# Altium PCB GPS_1.2.PcbDoc (part 1 of 2)
Units mil, origin at the board's own origin, x right, y up, seen from the top; angles counter-clockwise.
Board outline 1890 x 2770 mil, 4 copper layers (Top Layer, GND, VDD, Bottom Layer); 61 components, 50 nets, 274 pads, 157 vias.
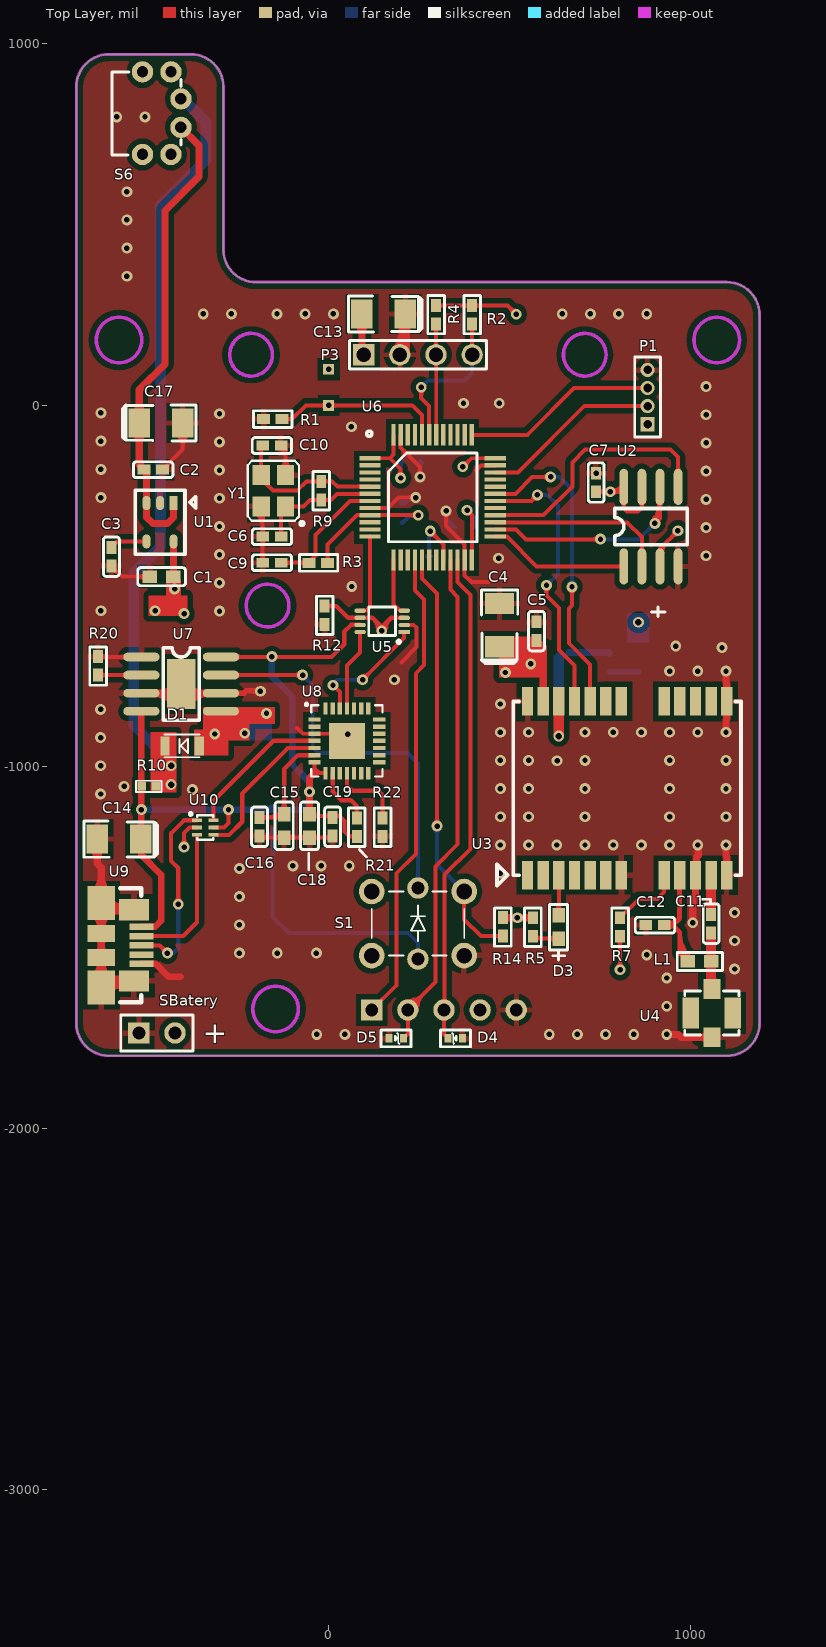
[diagram p0: Top Layer view]
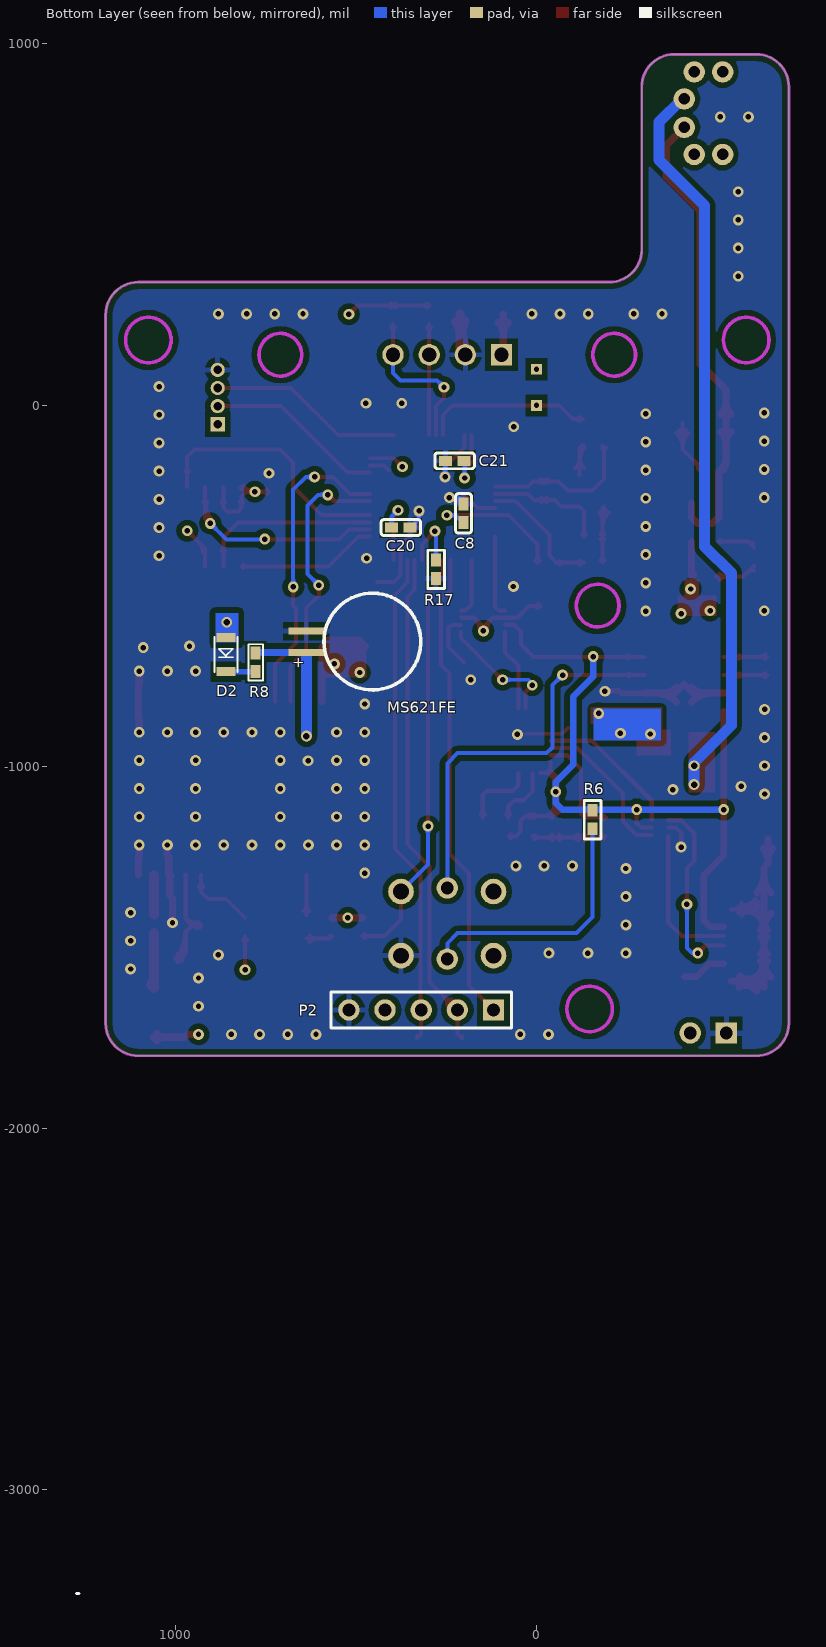
[diagram p1: Bottom Layer view, seen from below]
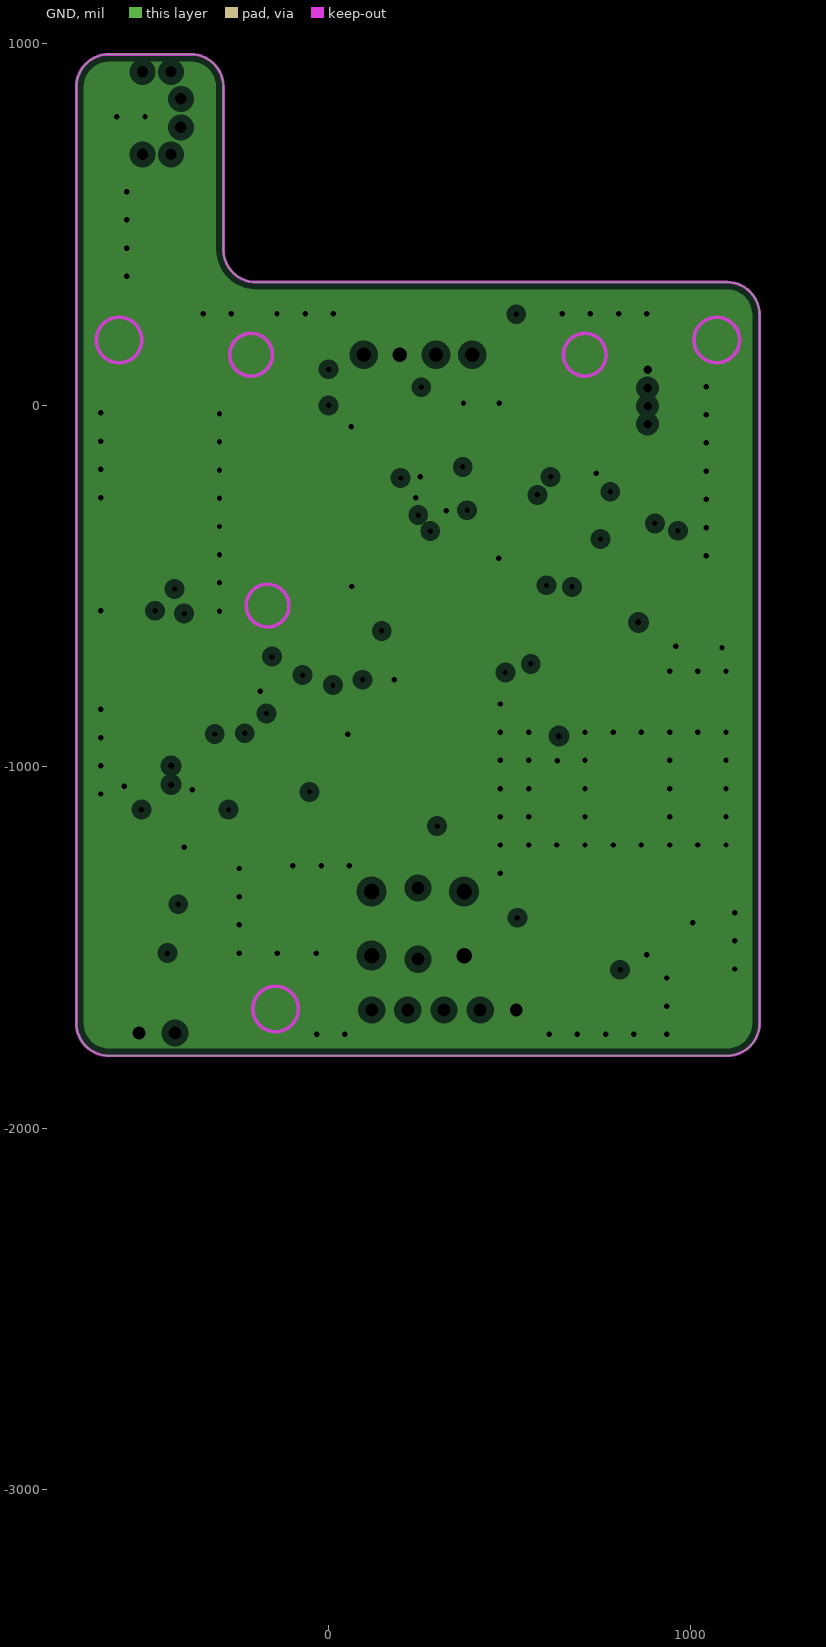
[diagram p2: GND, clearances drawn from the general rule]
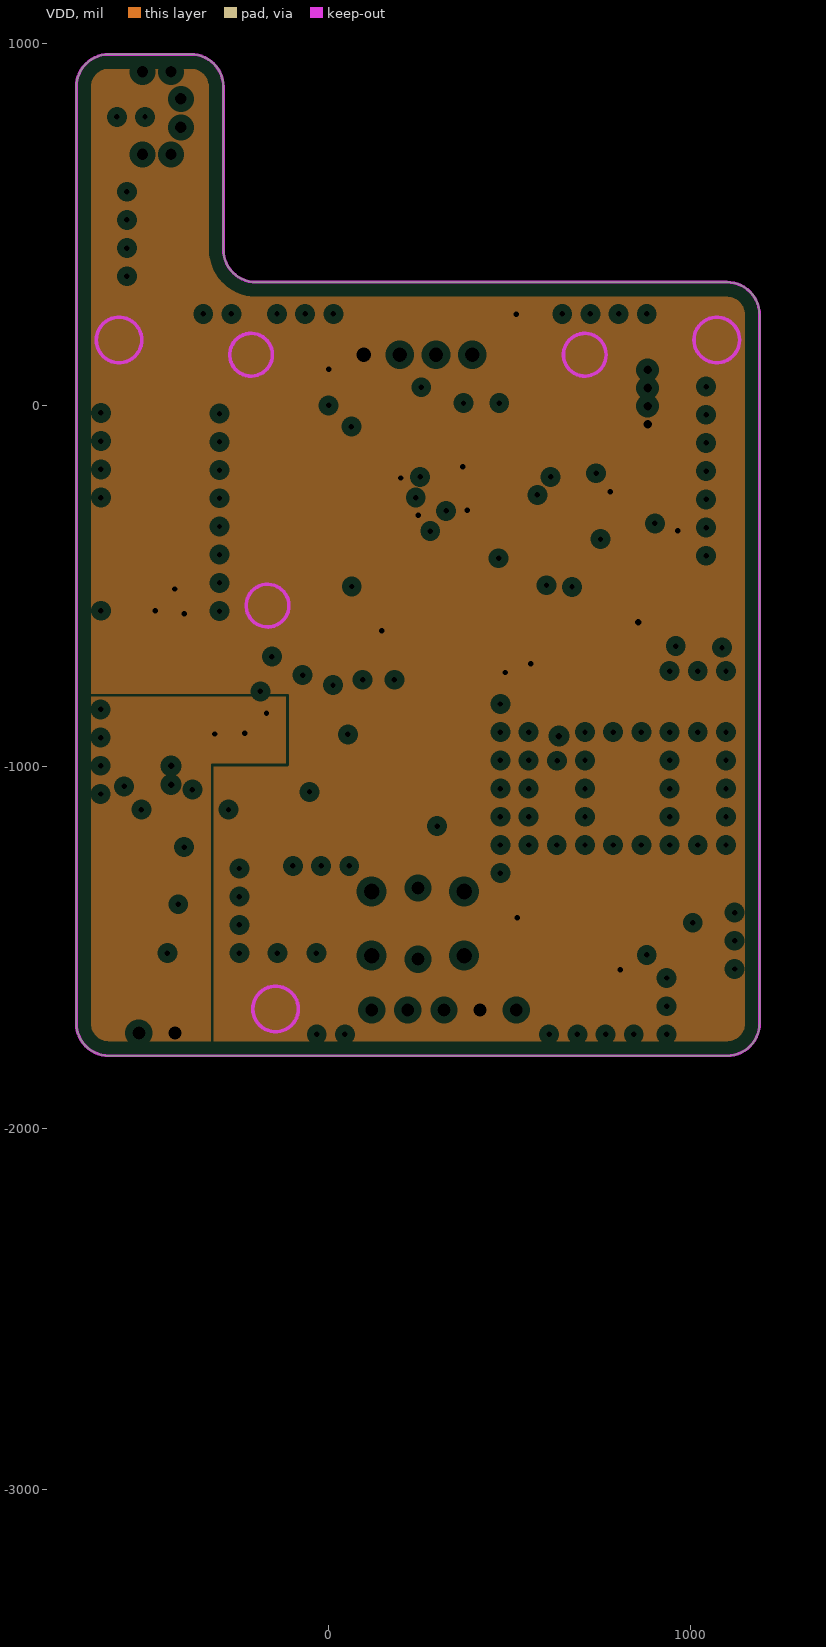
[diagram p3: VDD, clearances drawn from the general rule]

## Layer stack, top to bottom
Top Layer: signal copper 1.4
Dielectric: core 12.6, FR-4, Dk 4.8
GND: plane copper 1.4, net GND
Dielectric: prepreg 12.6, FR-4, Dk 4.8
VDD: plane copper 1.4, net VDD
Dielectric: core 12.6, FR-4, Dk 4.8
Bottom Layer: signal copper 1.4

## Board outline
-698,-1709 -698,881 cw(c-608,881) -608,971 -381,971 cw(c-381,881) -291,881 -291,430.68 ccw(c-201,430.68) -201,340.68 1101.76,340.68 cw(c1101.76,250.68) 1191.76,250.68 1191.76,-1709 1192,-1709 cw(c1102,-1709) 1102,-1799 -608,-1799 cw(c-608,-1709)

## Design rules (kind name [scope] priority, off if disabled: settings)
Clearance Clearance_1 [OnLayer('Keep-Out Layer')] p1 off: gap=20
Clearance Clearance_RF [InNetClass('RF')] p2 off: gap=20
Clearance [All] p3: gap=15
DiffPairsRouting [All] p1: maxlimit=10 minlimit=10 mostfreqgap=10 maxuncoupledlength=500
HoleSize [All] p1 off: absolutevalues=TRUE maxlimit=100 minlimit=1 maxpercent=80.000 minpercent=20.000
HoleToHoleClearance [All] p1 off: gap=10 allowstackedmicrovias=TRUE
LayerPairs [All] p1 off: enforce=TRUE
MinimumSolderMaskSliver [All] p1 off: minsoldermaskwidth=10
NetAntennae [All] p1 off: netantennaetolerance=0
PlaneClearance [All] p1: clearance=20
PlaneConnect [All] p1: planeconnectstyle=Relief reliefexpansion=20 reliefentries=4 reliefconductorwidth=15 reliefairgap=10
PolygonConnect PolygonConnect_1 [(InPadClass('All Pads'))] p1: connectstyle=Relief reliefconductorwidth=15 reliefentries=4 polygonreliefangle="90 Angle"
PolygonConnect [All] p2: connectstyle=Direct reliefconductorwidth=15 reliefentries=4 polygonreliefangle="90 Angle"
RoutingVias [All] p1: holewidth=28 width=50 viastyle="Through Hole" minholewidth=0 minwidth=0 maxholewidth=28 maxwidth=50
SilkToSilkClearance [All] p1 off: silktosilkclearance=10
SilkscreenOverComponentPads [All] p1 off: minsilkscreentomaskgap=10
SolderMaskExpansion [All] p1: expansion=4
Width [All] p1: maxlimit=50 minlimit=11 preferedwidth=11
18 further rules are at their usual default settings.

## Classes and differential pairs
differential pair D: +D_P -D_N

## Components (designator, comment, footprint, x,y, rotation, side; value= is the part's Value field where it differs from the comment)
C1 "10uF/10V" C0603 -462,-474 r0 top
C2 "0.1uF/10V" C0402 -511,-178 r180 top
C3 "0.01uF/10V" C0402 -601,-393 r90 top
C4 "10uF/10V" 3528 473,-668 r90 top
C5 "0.1uF/10V" C0402 575,-650 r270 top
C6 "18pF/10V" C0402 -182.5,-363.32 r180 top
C7 "0.01uF/10V" C0402 740,-239 r270 top
C8 "0.01uF/10V" C0402 202,-324.32 r270 bottom
C9 "0.01uF/10V" C0402 -182.5,-435.32 r180 top
C10 "18pF/10V" C0402 -131.31,-111.32 r0 top
C11 "470pF" C0402 1058,-1459.32 r270 top
C12 "33nF" C0402 877,-1438 r180 top
C13 "10uF/10V" C1206 152,253 r180 top
C14 "10uF/10V" 3528 -520,-1200 r180 top
C15 "4.7uF/10V" C0603 -123,-1163 r90 top
C16 "0.1uF/10V" C0402 -191,-1140 r90 top
C17 "10uF/10V" 3528 -524,-49 r0 top
C18 "10uF/10V" C0603 -53,-1163 r270 top
C19 "0.1uF/10V" C0402 11,-1140 r90 top
C20 "0.01uF/10V" C0402 401,-338 r0 bottom
C21 "0.01uF/10V" C0402 201,-153.32 r180 bottom
D1 "NSR0320MW2T1G" sod323 -358,-942 r180 top
D2 "RB751V40T1" SOD323 859,-642 r270 bottom
D3 "LED0" LED0603 636,-1475.32 r90 top
D4 "PESD0402-140" 0402-TVS 318,-1749 r180 top
D5 "PESD0402-140" 0402-TVS 219,-1753 r0 top
L1 "6.8nH" R0603 1026,-1538 r180 top
MS621FE "SBatery" MS621FE 637,-654 r0 bottom
P1 "MHDR1X4" SIP4_1.27 882,-52 r0 top
P2 "Header 5" HDR1X5 119,-1672.31 r0 bottom
P3 "MHDR1X4" OLED 246.88,140 r0 top locked
R1 "10K/5%" R0402 -128.81,-38 r0 top
R2 "5.1K/5%" R0402 397,225 r270 top
R3 "10K/5%" R0402 -54,-436 r180 top
R4 "5.1K/5%" R0402 297,225 r270 top
R5 "510R/5%" R0402 565,-1417.32 r90 top
R6 "1K/5%" R0402 -155,-1120 r90 bottom
R7 "10K/5%" R0402 806,-1417.32 r90 top
R8 "1K" 1005[0402] 777,-711 r90 bottom
R9 "1M/5%" R0402 -20.5,-210.32 r90 top
R10 "0" 0402R -478,-1054 r180 top
R12 "10K/5%" R0402 -11,-555 r90 top
R14 "10K/5%" R0402 482,-1417 r90 top
R17 "10K/5%" R0402 277.89,-427.81 r90 bottom
R20 "2K/5%" R0402 -638,-695 r90 top
R21 "1K/5%" R0402 78,-1141 r90 top
R22 "10K/5%" R0402 149,-1141 r90 top
S1 "KEY_TONE_LED" KEY_TONE_LED 246.88,-1433.41 r180 top locked (schematic designator U1)
S6 "SW-PB" KEY1 -408.63,768.88 r90 top locked
SBatery "SBatery" HDR1X2 -525,-1736 r0 top
U1 "TPS73633DBVR" SOP5-TPS73633DBVR -429,-270 r270 top
U2 "FM25V01" SO-8 816.5,-445.32 r90 top
U3 "NEO-M8N" NEO-M8N 550,-1299.32 r0 top locked
U4 "antenna" "Active antenna" 1060,-1681 r90 top locked
U5 "TXS0102" R-PDSO-G8 209,-627 r180 top
U6 "STM32F10xC8T6" LQFP-48 114.5,-146.32 r0 top
U7 "TP4056" SO-8-1 -408,-771 r0 top
U8 "CP2102" QFN-28 -39,-869 r0 top
U9 "USB" MOLEX-47346-0001 -518,-1442 r270 top
U10 "NUF2042XV6T1" UDFN -364,-1148 r270 top
Y1 "16MHz" OSCILLATOR-3.2X2.5 -153,-236 r180 top

## Footprints (in the part's own frame and the unit in brackets; to place one, negate y for a bottom-side part, rotate by r counter-clockwise, add the part's x,y. Pads: shape width x height; smd on the part's side, far side on the other; paste and mask are expansions set on the pad)
0402-TVS [mil]
  rect 20x24 smd: 1(-52,2) 2(-12.31,2)
  silkscreen extent -74,-21 9,25
0402R [mm]
  rect 0.6x0.6 smd: 1(0,0) 2(1,0)
  silkscreen extent -0.4,-0.4 1.4,0.4
1005[0402] [mm] "Chip Resistor; Body 1.1 x 0.5 mm (LxW typ)"
  rect 0.9x0.7 smd: 1(-0.65,0) 2(0.65,0)
  silkscreen extent -1.27,-0.51 1.27,0.51
3528 [mil]
  rect 59.05x80 smd: 1(0,0) 2(120,0)
  silkscreen extent -46,-50 157,50
"Active antenna" [mm]
  rect 1.4x1.2 smd: 0(-1.7,0) 1(1.7,0)
  rect 2.2x1.15 smd: 0(0,1.475) 0(0,-1.475)
  silkscreen extent -1.55,-1.91 1.55,1.91
C0402 [mm]
  rect 0.9x0.7 smd: 1(0,0) 2(-1.3,0)
  silkscreen extent -2.04,-0.56 0.74,0.56
C0603 [mil]
  rect 40x35 smd: 1(-32.5,0) 2(32.5,0)
  silkscreen extent -66,-25 66,25
C1206 [mil]
  rect 59.05x80 smd: 1(-60,0) 2(60,0)
  silkscreen extent -106,-50 97,50
HDR1X2 [mm] "Connector; Header; 2 Position"
  rect 1.5x1.5 hole 0.9: 1(0,0)
  round 1.5 hole 0.9: 2(2.54,0)
  silkscreen extent -1.27,-1.27 3.81,1.27
HDR1X5 [mm] "Connector; Header; 5 Position"
  rect 1.5x1.5 hole 0.9: 1(0,0)
  round 1.5 hole 0.9: 2(2.54,0) 3(5.08,0) 4(7.62,0) 5(10.16,0)
  silkscreen extent -1.27,-1.27 11.43,1.27
KEY1 [mm]
  round 1.5 hole 0.8: 0(-1.9,0.7) 0(-1.9,2.7) 0(3.9,0.7) 0(3.9,2.7) 1(0,0) 2(2,0)
  silkscreen extent -1.93,0 3.89,4.85
KEY_TONE_LED [mm]
  round 0.2 on Top Overlay: 0(0,0)
  round 1.8 hole 1.1: 1(-3.25,2.25) 2(3.25,2.25) 3(-3.25,-2.25) 4(3.25,-2.25)
  round 1.5 hole 0.9: 5(0,-2.5) 6(0,2.5)
  silkscreen extent -3.25,-2.25 3.25,2.25
LED0603 [mil]
  rect 40x35 smd: 1(0,0) 2(65,0)
  silkscreen extent -59,-25 94,25
LQFP-48 [mm]
  rect 1.5x0.3 smd: 1(0,0) 2(0,-0.5) 3(0,-1) 4(0,-1.5) 5(0,-2) 6(0,-2.5) 7(0,-3) 8(0,-3.5) 9(0,-4) 10(0,-4.5) 11(0,-5) 12(0,-5.5) 25(8.8,-5.5) 26(8.8,-5) 27(8.8,-4.5) 28(8.8,-4) 29(8.8,-3.5) 30(8.8,-3) 31(8.8,-2.5) 32(8.8,-2) 33(8.8,-1.5) 34(8.8,-1) 35(8.8,-0.5) 36(8.8,0)
  rect 0.3x1.5 smd: 13(1.65,-7.15) 14(2.15,-7.15) 15(2.65,-7.15) 16(3.15,-7.15) 17(3.65,-7.15) 18(4.15,-7.15) 19(4.65,-7.15) 20(5.15,-7.15) 21(5.65,-7.15) 22(6.15,-7.15) 23(6.65,-7.15) 24(7.15,-7.15) 37(7.15,1.65) 38(6.65,1.65) 39(6.15,1.65) 40(5.65,1.65) 41(5.15,1.65) 42(4.65,1.65) 43(4.15,1.65) 44(3.65,1.65) 45(3.15,1.65) 46(2.65,1.65) 47(2.15,1.65) 48(1.65,1.65)
  silkscreen extent -0.24,-5.86 7.51,1.91
MOLEX-47346-0001 [mil]
  rect 18x67 smd: 1(0,0) 2(26,0) 3(52,0) 4(77.59,0) 5(103.18,0)
  rect 94x75 smd: 6(-65,-111) 9(168.14,-111)
  rect 59x83 smd: 7(-47,-20) 8(150.43,-20)
  rect 47x75 smd: 10(84.97,-111) 11(19,-111)
  silkscreen extent -106,-59 209,0
MS621FE [mm]
  rect 2.5x0.5 smd: 1(0,-0.749) 2(0,0.749)
  silkscreen extent -8.04,-3.41 -1.25,3.39
NEO-M8N [mm]
  rect 0.8x2 smd: 1(0,0) 2(1.1,0) 3(2.2,0) 4(3.3,0) 5(4.4,0) 6(5.5,0) 7(6.6,0) 8(9.6,0) 9(10.7,0) 10(11.8,0) 11(12.9,0) 12(14,0) 13(14,12.2) 14(12.9,12.2) 15(11.8,12.2) 16(10.7,12.2) 17(9.6,12.2) 18(6.6,12.2) 19(5.5,12.2) 20(4.4,12.2) 21(3.3,12.2) 22(2.2,12.2) 23(1.1,12.2) 24(0,12.2)
  silkscreen extent -2.14,-0.76 15,12.2
OLED [mm]
  rect 1.5x1.5 hole 1: 1(-3.81,0)
  round 1.5 hole 1: 2(-1.27,0) 3(1.27,0) 4(3.81,0)
  Keep-Out Layer circle w0.254: c-11.725,0 r1.5
  Keep-Out Layer circle w0.254: c11.725,0 r1.5
  silkscreen extent -4.81,-1 4.81,1
OSCILLATOR-3.2X2.5 [mil]
  rect 48x56 smd: 1(-33.73,43.65) 2(-33.73,-43.65) 3(33.73,-43.65) 4(33.73,43.65)
  silkscreen extent -83,-83 71,95
QFN-28 [mil]
  rect 34x12 smd mask+5: 1(0,0) 2(0,-19.68) 3(0,-39.37) 4(0,-59.06) 5(0,-78.74) 6(0,-98.43) 7(0,-118.11) 15(179,-118.11) 16(179,-98.43) 17(179,-78.74) 18(179,-59.06) 19(179,-39.37) 20(179,-19.69) 21(179,0)
  rect 12x34 smd mask+5: 8(30.44,-148.56) 9(50.13,-148.56) 10(69.81,-148.56) 11(89.5,-148.56) 12(109.19,-148.56) 13(128.87,-148.56) 14(148.56,-148.56) 22(148.56,30.44) 23(128.87,30.44) 24(109.19,30.44) 25(89.5,30.44) 26(69.82,30.44) 27(50.13,30.44) 28(30.44,30.44)
  rect 100x100 smd mask+5: 29(89.5,-59.06)
  silkscreen extent -25,-158 188,44
R0402 [mm]
  rect 0.9x0.7 smd: 1(0,0) 2(-1.3,0)
  silkscreen extent -2.01,-0.58 0.69,0.58
R0603 [mil]
  rect 40x35 smd: 1(-32.5,0) 2(32.5,0)
  silkscreen extent -63,-25 62,25
R-PDSO-G8 [mm]
  rect 0.8x0.3 smd: 1(0,0)
  oval 0.8x0.3 smd: 2(0,-0.5) 3(0,-1) 4(0,-1.5) 5(3.1,-1.5) 6(3.1,-1) 7(3.1,-0.5) 8(3.1,0)
  silkscreen extent 0.29,-1.75 2.49,0.78
SIP4_1.27 [mm]
  rect 1x1 hole 0.6: 1(0,0)
  round 1 hole 0.6: 2(0,1.27) 3(0,2.54) 4(0,3.81)
  silkscreen extent -0.9,-0.9 0.9,4.71
SO-8 [mil]
  oval 100x24 smd: 1(0,0) 2(0,-50) 3(0,-100) 4(0,-150) 5(220,-150) 6(220,-100) 7(220,-50) 8(220,0)
  silkscreen extent 60,-175 160,25
SO-8-1 [mil]
  rect 78.74x137.8 smd: 0(0,0)
  oval 100x24 smd: 1(-110,75) 2(-110,25) 3(-110,-25) 4(-110,-75) 5(110,-75) 6(110,-25) 7(110,25) 8(110,75)
  silkscreen extent -50,-100 50,100
sod323 [mm]
  rect 0.65x1.35 smd: A(0,0) K(2.4,0)
  silkscreen extent -0.03,-0.8 2.44,0.8
SOD323 [mm]
  rect 0.65x1.35 smd: A(0,0) K(2.4,0)
  silkscreen extent -0.03,-0.8 2.44,0.8
SOP5-TPS73633DBVR [mm]
  rect 1x0.55 smd: 1(0,0)
  oval 1x0.55 smd: 2(0,-0.95) 3(0,-1.9) 4(2.7,-1.9) 5(2.7,0)
  silkscreen extent -0.9,-2.7 3.6,1.55
UDFN [mm]
  rect 0.25x0.7 smd: 1(0,0) 2(0.5,0) 3(1,0) 4(1,1.15) 5(0.5,1.15) 6(0,1.15)
  silkscreen extent -0.55,-0.55 1.35,1.15

## Part data
C1 C2 C3 C4 C5 C6 C7 C8 C9 C10 C11 C12 C15 C16 C18 C19 C20 C21: library part Cap, "Capacitor"
C13 C14 C17: library part "Cap Pol2", "Polarized Capacitor (Axial)"
D1 D2: library part Diode, "Default Diode"
D3: "Typical INFRARED GaAs LED"
D4 D5: library part "D Zener", "Zener Diode"
L1: library part Inductor, "Inductor"
P1 P3: "Header, 4-Pin"
P2: "Header, 5-Pin"
R1 R2 R3 R4 R5 R6 R7 R8 R9 R10 R12 R14 R17 R20: library part Res2, "Resistor"
R21 R22: library part Resistor, "Resistor SMD - IEC symbol version"
S6: "Switch"
U2: library part FM25CL64B
U6: library part STM32F100C8T6
U8: "Imported"
U9: library part MICRO_USB
Y1: library part XTAL3

## Free pads (board coordinates)
  rect 30x30 hole 15: 0(0,100) 1(0,0)

## Via types
v1: diameter 30, hole 15, Top Layer to Bottom Layer, 153 vias
v2: diameter 30, hole 18, Top Layer to Bottom Layer, 4 vias

## Nets (pads, with @x,y where several pads share a name; then routed paths per layer and width w, separated by ;. In a path a pad name is that pad's centre, name@x,y a point inside that pad or via, vN(x,y) a via of type N, cw(c..) or ccw(c..) an arc to the next point about the centre after c; other vN are vias at no path point)
BAT: D1.A SBatery.2 U7.5
  other v1: -315,-909 -232,-907 -172,-852
CHRG: S1.5 U7.7 | length 1284.6
  Top Layer w11: U7.7@-298,-746 v1(-72,-746) ; -244.31,-746 cw(c-244.31,-730.31) -255.4,-741.4 ccw(c-244.31,-730.31) -244.31,-746 ; -244.31,-746 ccw(c-244.31,-761.69) -255.4,-750.6 cw(c-244.31,-761.69) -244.31,-746 ; -94.94,-746 cw(c-94.94,-768.93) -78.72,-752.72 ccw(c-94.94,-768.93) -94.94,-746 ; -94.94,-746 ccw(c-94.94,-723.07) -78.72,-739.28 cw(c-94.94,-723.07) -94.94,-746
  Bottom Layer w11: v1(-72,-746) -44,-774 -44,-946 -28,-962 218,-962 246.88,-990.88 S1.5@246.88,-1334.98 ; -55.78,-762.22 cw(c-39.56,-746) -62.5,-746 ccw(c-39.56,-746) -55.78,-762.22 ; -55.78,-762.22 ccw(c-72,-778.43) -72,-755.5 cw(c-72,-778.43) -55.78,-762.22
D_N: U8.5 U10.4 | length 425.2
  Top Layer w12: U10.4@-318.72,-1188.61 -275.61,-1188.61 -239,-1152 -239,-1074 -112.74,-947.74 U8.5@-39,-947.74
D_P: U8.4 U10.6 | length 401.4
  Top Layer w12: U10.6@-318.72,-1146.76 -318.72,-1093.72 -153.06,-928.06 U8.4@-39,-928.06
FRAM_CLK: U2.6 U6.26 | length 1107.8
  Top Layer w11: U6.26@460.96,-343.16 518.16,-343.16 546.31,-371.32 750.69,-371.32 v1(752,-370) ; v1@900.9,-316.95 ccw(c897.4,-296.45) 915.42,-306.85 ; v1@901.18,-327.02 cw(c916.99,-318.65) 901.5,-309.7 ; v1(902.5,-326.32) 916.5,-312.31 ; U2.6@910.87,-266.56 cw(c892.49,-277.18) 913,-282.67 ; v1@910.9,-321.87 cw(c937.75,-307.67) 911.44,-292.48 ; v1@911.68,-323.86 cw(c929.06,-319.2) 913.48,-310.21 ; U2.6@916.5,-225.32 916.5,-312.31 ; 916.5,-312.32 cw(c905.27,-301.09) 903.54,-316.87 ccw(c905.27,-301.09) 916.5,-312.32 ; 916.5,-312.32 ccw(c927.73,-323.54) 911.95,-325.28 cw(c927.73,-323.54) 916.5,-312.32 ; 916.5,-279.01 cw(c932.2,-279.01) 921.1,-267.91 ccw(c932.2,-279.01) 916.5,-279.01 ; 916.5,-279.01 ccw(c900.81,-279.01) 911.91,-267.91 cw(c900.81,-279.01) 916.5,-279.01 ; 725.89,-371.32 ccw(c725.89,-343.89) 745.28,-363.28 cw(c725.89,-343.89) 725.89,-371.32 ; 732.24,-371.32 cw(c732.24,-389.76) 745.28,-376.72 ccw(c732.24,-389.76) 732.24,-371.32 ; v1@895.79,-319.6 ccw(c845.77,-269.58) 916.5,-269.58 cw(c845.77,-269.58) v1@895.79,-319.6 ; v1@903.56,-327.38 ccw(c872.33,-296.14) 916.5,-296.14 cw(c872.33,-296.14) v1@903.56,-327.38
  Bottom Layer w11: v1@752,-371.32 857.5,-371.32 v1(902.5,-326.32) ; 886.29,-342.53 cw(c902.5,-358.75) 902.5,-335.82 ccw(c902.5,-358.75) 886.29,-342.53 ; 886.29,-342.53 ccw(c870.07,-326.32) 893,-326.32 cw(c870.07,-326.32) 886.29,-342.53
FRAM_CS: U2.1 U6.25 | length 439
  Top Layer w11: U6.25@460.96,-362.85 492.85,-362.85 575.31,-445.32 U2.1@816.5,-445.32 ; 800.81,-445.32 cw(c800.81,-461.01) 811.91,-449.91 ccw(c800.81,-461.01) 800.81,-445.32 ; 800.81,-445.32 ccw(c800.81,-429.62) 811.91,-440.72 cw(c800.81,-429.62) 800.81,-445.32
FRAM_MISO: U2.2 U6.27 | length 552.6
  Top Layer w11: U6.27@460.96,-323.48 825.48,-323.48 866.5,-364.5 U2.2@866.5,-445.32 ; 866.5,-391.62 cw(c850.81,-391.62) 861.91,-402.72 ccw(c850.81,-391.62) 866.5,-391.62 ; 866.5,-391.62 ccw(c882.2,-391.62) 871.1,-402.72 cw(c882.2,-391.62) 866.5,-391.62
FRAM_MOSI: U2.5 U6.28 | length 759.5
  Top Layer w11: U6.28@460.96,-303.8 594.2,-303.8 674,-224 674,-157.82 709.5,-122.32 945.5,-122.32 966.5,-143.32 U2.5@966.5,-225.32 ; 966.5,-171.62 cw(c950.81,-171.62) 961.91,-182.72 ccw(c950.81,-171.62) 966.5,-171.62 ; 966.5,-171.62 ccw(c982.2,-171.62) 971.1,-182.72 cw(c982.2,-171.62) 966.5,-171.62
GND: C1.1 C2.2 C3.2 C4.2 C5.2 C6.1 C7.2 C8.2 C9.1 C10.1 C12.1 C13.1 C14.2 C15.1 C16.2 C17.2 C18.2 C19.2 C20.2 C21.2 D4.1 D5.1 MS621FE.1 P1.4 P2.5 P3.2 R1.2 R12.2 R17.2 R20.1 R22.2 S1.1 SBatery.1 U1.2 U2.4 U3.7 U3.10 U3.12 U3.13 U3.24 U4.0@1060,-1747.93 U5.2 U6.8 U6.23 U6.35 U6.47 U7.0 U7.1 U7.3 U7.6 U8.3 U8.29 U9.5 U9.6 U9.7 U9.8 U9.9 U9.10 U9.11 U10.2 Y1.2 Y1.4 | length 10048.3
  Top Layer w11: U9.6@-629,-1377 -611,-1395 U9.7@-538,-1395 ; C3.2@-601,-444.18 -571.18,-474 C1.1@-494.5,-474 ; C2.2@-459.82,-178 -404,-122.18 C17.2@-404,-49 ; C16.2@-191,-1191.18 -186.68,-1195.5 C15.1@-123,-1195.5 C18.2@-53,-1195.5 6.68,-1195.5 C19.2@11,-1191.18 ; v1@-190,-790 v1(-189,-791) ; Y1.4@-186.73,-279.65 -182.5,-283.89 C6.1@-182.5,-363.32 C9.1@-182.5,-435.32 ; C10.1@-131.31,-111.32 -119.27,-123.36 Y1.2@-119.27,-192.35 ; -123.2,-134.54 cw(c-110.21,-127.04) C10.1@-121.27,-116.91 ; -87,-892 -70.63,-908.37 U8.3@-39,-908.37 U8.29@30.81,-908.37 ; U6.8@114.5,-284.11 163.89,-284.11 193,-255 v1(241,-255) ; U6.47@199.15,-81.35 199.15,-117.15 253,-171 v1(253,-198) ; 201,-711 243,-669 243,-615 235.31,-607.32 U5.2@209,-607.32 ; v1(325,-292) 325,-334 376.31,-385.31 U6.23@376.31,-427.81 376.31,-470.31 395,-489 442,-489 ; 408,-180 422,-166 U6.35@460.96,-166 ; U9.6@-607.94,-1395 cw(c-607.94,-1452.94) -566.97,-1411.97 ccw(c-607.94,-1452.94) U9.6@-607.94,-1395 ; U9.6@-607.94,-1395 ccw(c-607.94,-1337.06) -566.97,-1378.03 cw(c-607.94,-1337.06) U9.6@-607.94,-1395 ; -591.31,-1387.34 cw(c-598.75,-1415.08) -572.19,-1404.14 ccw(c-598.75,-1415.08) -591.31,-1387.34 ; -591.31,-1387.34 ccw(c-585.67,-1366.29) -568.7,-1379.95 cw(c-585.67,-1366.29) -591.31,-1387.34 ; -588.43,-1381.49 cw(c-593.61,-1400.8) -573.79,-1398.16 ccw(c-593.61,-1400.8) -588.43,-1381.49 ; -588.43,-1381.49 ccw(c-581.72,-1356.44) -565.25,-1376.47 cw(c-581.72,-1356.44) -588.43,-1381.49 ; -586.74,-1398.88 cw(c-583.31,-1411.68) -571.46,-1405.75 ccw(c-583.31,-1411.68) -586.74,-1398.88 ; -586.74,-1398.88 ccw(c-592.34,-1377.99) -572.27,-1386.05 cw(c-592.34,-1377.99) -586.74,-1398.88 ; -581.38,-1395 cw(c-581.38,-1426.38) -559.19,-1404.19 ccw(c-581.38,-1426.38) -581.38,-1395 ; -581.38,-1395 ccw(c-581.38,-1363.62) -559.19,-1385.81 cw(c-581.38,-1363.62) -581.38,-1395 ; U9.7@-574.36,-1404 cw(c-565.91,-1372.48) -597.76,-1379.56 ccw(c-565.91,-1372.48) U9.7@-574.36,-1404 ; U9.7@-574.36,-1404 ccw(c-584.39,-1441.46) -608.84,-1411.35 cw(c-584.39,-1441.46) U9.7@-574.36,-1404 ; U9.7@-538,-1395 cw(c-538.01,-1304.53) -605.22,-1365.08 ccw(c-538.01,-1304.53) U9.7@-538,-1395 ; -525.97,-474 cw(c-525.97,-502.97) -505.49,-482.49 ccw(c-525.97,-502.97) -525.97,-474 ; -525.97,-474 ccw(c-525.97,-445.03) -505.49,-465.51 cw(c-525.97,-445.03) -525.97,-474 ; -404,-117.48 cw(c-345.99,-117.48) -387.01,-76.46 ccw(c-345.99,-117.48) -404,-117.48 ; -404,-117.48 ccw(c-462.01,-117.48) -420.99,-76.46 cw(c-462.01,-117.48) -404,-117.48 ; -404,-90.92 cw(c-372.55,-90.92) -394.79,-68.68 ccw(c-372.55,-90.92) -404,-90.92 ; -404,-90.92 ccw(c-435.45,-90.92) -413.21,-68.68 cw(c-435.45,-90.92) -404,-90.92 ; -182.5,-415.33 cw(c-202.48,-415.33) -188.35,-429.46 ccw(c-202.48,-415.33) -182.5,-415.33 ; -182.5,-415.33 ccw(c-162.51,-415.33) -176.64,-429.46 cw(c-162.51,-415.33) -182.5,-415.33 ; -182.5,-383.3 cw(c-162.51,-383.3) -176.64,-369.17 ccw(c-162.51,-383.3) -182.5,-383.3 ; -182.5,-383.3 ccw(c-202.48,-383.3) -188.35,-369.17 cw(c-202.48,-383.3) -182.5,-383.3 ; -182.5,-343.33 cw(c-202.48,-343.33) -188.35,-357.46 ccw(c-202.48,-343.33) -182.5,-343.33 ; -182.5,-343.33 ccw(c-162.51,-343.33) -176.64,-357.46 cw(c-162.51,-343.33) -182.5,-343.33 ; -151.97,-1195.5 cw(c-151.97,-1224.47) -131.49,-1203.99 ccw(c-151.97,-1224.47) -151.97,-1195.5 ; -151.97,-1195.5 ccw(c-151.97,-1166.53) -131.49,-1187.01 cw(c-151.97,-1166.53) -151.97,-1195.5 ; -119.27,-143.68 cw(c-163.93,-143.68) -132.35,-175.27 ccw(c-163.93,-143.68) -119.27,-143.68 ; -119.27,-143.68 ccw(c-74.6,-143.68) -106.19,-175.27 cw(c-74.6,-143.68) -119.27,-143.68 ; -94.03,-1195.5 cw(c-94.03,-1166.53) -114.51,-1187.01 ccw(c-94.03,-1166.53) -94.03,-1195.5 ; -94.03,-1195.5 ccw(c-94.03,-1224.47) -114.51,-1203.99 cw(c-94.03,-1224.47) -94.03,-1195.5 ; -81.97,-1195.5 cw(c-81.97,-1224.47) -61.49,-1203.99 ccw(c-81.97,-1224.47) -81.97,-1195.5 ; -81.97,-1195.5 ccw(c-81.97,-1166.53) -61.49,-1187.01 cw(c-81.97,-1166.53) -81.97,-1195.5 ; -24.03,-1195.5 cw(c-24.03,-1166.53) -44.51,-1187.01 ccw(c-24.03,-1166.53) -24.03,-1195.5 ; -24.03,-1195.5 ccw(c-24.03,-1224.47) -44.51,-1203.99 cw(c-24.03,-1224.47) -24.03,-1195.5 ; 218.06,-255 cw(c218.06,-277.93) 234.28,-261.72 ccw(c218.06,-277.93) 218.06,-255 ; 218.06,-255 ccw(c218.06,-232.07) 234.28,-248.28 cw(c218.06,-232.07) 218.06,-255 ; 253,-175.07 cw(c230.06,-175.07) 246.28,-191.28 ccw(c230.06,-175.07) 253,-175.07 ; 253,-175.07 ccw(c275.94,-175.07) 259.72,-191.28 cw(c275.94,-175.07) 253,-175.07 ; 325,-314.93 cw(c347.94,-314.93) 331.72,-298.72 ccw(c347.94,-314.93) 325,-314.93 ; 325,-314.93 ccw(c302.06,-314.93) 318.28,-298.72 cw(c302.06,-314.93) 325,-314.93 ; U9.6@-621.57,-1379.81 ccw(c-587.43,-1349.06) -587.43,-1395 cw(c-587.43,-1349.06) U9.6@-621.57,-1379.81 ; U9.6@-613.4,-1372.44 ccw(c-562.72,-1326.79) -562.72,-1395 cw(c-562.72,-1326.79) U9.6@-613.4,-1372.44 ; U9.6@-608.5,-1381.95 ccw(c-585.88,-1376.92) -591.87,-1399.31 cw(c-585.88,-1376.92) U9.6@-608.5,-1381.95 ; U9.6@-606.37,-1409.13 cw(c-572.27,-1443.23) -572.27,-1395 ccw(c-572.27,-1443.23) U9.6@-606.37,-1409.13 ; C3.2@-601,-456.4 cw(c-601,-485.89) -580.15,-465.04 ccw(c-601,-485.89) C3.2@-601,-456.4 ; C2.2@-447.6,-178 cw(c-418.11,-178) -438.96,-157.15 ccw(c-418.11,-178) C2.2@-447.6,-178 ; Y1.4@-199.81,-296.74 cw(c-241.62,-338.54) -182.5,-338.54 ccw(c-241.62,-338.54) Y1.4@-199.81,-296.74 ; Y1.4@-192.04,-288.96 cw(c-215.07,-311.99) -182.5,-311.99 ccw(c-215.07,-311.99) Y1.4@-192.04,-288.96 ; C16.2@-185.15,-1200.97 cw(c-171.93,-1214.18) -171.93,-1195.5 ccw(c-171.93,-1214.18) C16.2@-185.15,-1200.97 ; C16.2@-185.15,-1189.26 ccw(c-170.09,-1174.21) -170.09,-1195.5 cw(c-170.09,-1174.21) C16.2@-185.15,-1189.26 ; -182.5,-318.09 cw(c-152.3,-318.09) -173.65,-296.74 ccw(c-152.3,-318.09) -182.5,-318.09 ; C10.1@-133.23,-117.17 cw(c-166.95,-150.88) -119.27,-150.88 ccw(c-166.95,-150.88) C10.1@-133.23,-117.17 ; C10.1@-125.45,-109.39 cw(c-140.39,-124.33) -119.27,-124.33 ccw(c-140.39,-124.33) C10.1@-125.45,-109.39 ; -9.91,-1195.5 ccw(c-9.91,-1174.21) 5.15,-1189.26 cw(c-9.91,-1174.21) -9.91,-1195.5 ; -8.07,-1195.5 cw(c-8.07,-1214.18) 5.15,-1200.97 ccw(c-8.07,-1214.18) -8.07,-1195.5
  Top Layer w12: R20.1@-637,-696 U7.1@-518,-696 ; v1(-400,-1222) -400,-1183 -384.69,-1167.68 U10.2@-364,-1167.68 ; -570.49,-696 cw(c-570.49,-710.49) -560.24,-700.24 ccw(c-570.49,-710.49) -570.49,-696 ; -570.49,-696 ccw(c-570.49,-681.51) -560.24,-691.76 cw(c-570.49,-681.51) -570.49,-696 ; -400,-1200.27 cw(c-421.73,-1200.27) -406.36,-1215.64 ccw(c-421.73,-1200.27) -400,-1200.27 ; -400,-1200.27 ccw(c-378.27,-1200.27) -393.64,-1215.64 cw(c-378.27,-1200.27) -400,-1200.27 ; R20.1@-632.5,-700.5 cw(c-621.63,-711.37) -621.63,-696 ccw(c-621.63,-711.37) R20.1@-632.5,-700.5 ; R20.1@-632.5,-689.5 ccw(c-616.8,-673.8) -616.8,-696 cw(c-616.8,-673.8) R20.1@-632.5,-689.5
  Top Layer w15: U7.6@-298,-796 -234,-796 -228,-790 v1@-190,-790 ; -209.52,-790 cw(c-209.52,-811.52) -194.3,-796.3 ccw(c-209.52,-811.52) -209.52,-790 ; -204.69,-790 ccw(c-204.69,-775.31) -194.3,-785.7 cw(c-204.69,-775.31) -204.69,-790
  Top Layer w18: U9.5@-518,-1545.18 -477.82,-1545.18 -442,-1581 -409,-1581
  Top Layer w20: C14.2@-640,-1200 -640,-1267 -629,-1278 U9.6@-629,-1377 U9.11@-629,-1461 U9.10@-629,-1526.97 U9.9@-629,-1610.14 -611.28,-1592.43 U9.8@-538,-1592.43 ; U7.3@-518,-796 -433,-796 U7.0@-408,-771 -383,-796 U7.6@-298,-796 ; U7.3@-489.84,-796 cw(c-489.84,-882.36) U7.0@-428.77,-821.3 ; -467.98,-796 ccw(c-467.98,-740.55) U7.0@-428.77,-779.76 ; U7.0@-387.23,-821.3 cw(c-326.16,-882.36) U7.6@-326.16,-796 ; U7.0@-387.23,-779.76 ccw(c-348.02,-740.55) -348.02,-796 ; v1(935,-1740) 967,-1740 974.93,-1747.93 U4.0@1060,-1747.93 ; v1(1007,-1431) 1007,-1363 1014.57,-1355.43 U3.10@1014.57,-1299.32 ; U3.10@1012.01,-1301.87 U3.10@1014.57,-1299.32 ; v1(1021,-1216) 1022,-1217 1022,-1244.72 1017.13,-1249.59 1017.13,-1296.76 U3.10@1014.57,-1299.32 ; v1(1099,-1216) 1099,-1248 1101.18,-1250.18 U3.12@1101.18,-1299.32 ; v1(1099,-904) 1099,-870 1101.18,-867.82 U3.13@1101.18,-819 1101.18,-769.18 1099,-767 v1(1099,-735) ; -640,-1257.62 cw(c-592.86,-1257.62) -626.19,-1224.28 ccw(c-592.86,-1257.62) -640,-1257.62 ; -640,-1257.62 ccw(c-687.14,-1257.62) -653.81,-1224.28 cw(c-687.14,-1257.62) -640,-1257.62 ; -629,-1559.56 cw(c-596.41,-1559.56) -619.45,-1536.52 ccw(c-596.41,-1559.56) -629,-1559.56 ; -629,-1559.56 ccw(c-661.59,-1559.56) -638.55,-1536.52 cw(c-661.59,-1559.56) -629,-1559.56 ; U9.10@-629,-1534.25 cw(c-695.39,-1534.25) -648.45,-1581.2 ccw(c-695.39,-1534.25) U9.10@-629,-1534.25 ; U9.10@-629,-1534.25 ccw(c-562.61,-1534.25) U9.9@-609.55,-1581.2 ; U9.10@-629,-1534.25 ccw(c-562.61,-1534.25) U9.9@-609.55,-1581.2 ; -629,-1494.38 cw(c-661.59,-1494.38) -638.55,-1517.43 ccw(c-661.59,-1494.38) -629,-1494.38 ; -629,-1494.38 ccw(c-596.41,-1494.38) -619.45,-1517.43 cw(c-596.41,-1494.38) -629,-1494.38 ; -629,-1493.59 cw(c-596.41,-1493.59) -619.45,-1470.55 ccw(c-596.41,-1493.59) -629,-1493.59 ; -629,-1493.59 ccw(c-661.59,-1493.59) -638.55,-1470.55 cw(c-661.59,-1493.59) -629,-1493.59 ; U9.11@-629,-1452.89 cw(c-562.61,-1452.89) -609.55,-1405.95 ccw(c-562.61,-1452.89) U9.11@-629,-1452.89 ; U9.11@-629,-1452.89 ccw(c-695.39,-1452.89) -648.45,-1405.95 cw(c-695.39,-1452.89) U9.11@-629,-1452.89 ; -629,-1428.41 cw(c-661.59,-1428.41) -638.55,-1451.45 ccw(c-661.59,-1428.41) -629,-1428.41 ; -629,-1428.41 ccw(c-596.41,-1428.41) -619.45,-1451.45 cw(c-596.41,-1428.41) -629,-1428.41 ; -629,-1301.11 cw(c-695.39,-1301.11) -648.45,-1348.05 ccw(c-695.39,-1301.11) -629,-1301.11 ; -629,-1301.11 ccw(c-562.61,-1301.11) -609.55,-1348.05 cw(c-562.61,-1301.11) -629,-1301.11 ; U9.9@-609.55,-1581.2 ccw(c-582.45,-1554.09) -582.45,-1592.43 cw(c-582.45,-1554.09) U9.9@-609.55,-1581.2 ; U9.9@-597.08,-1592.43 cw(c-597.08,-1639.5) -563.79,-1606.21 ccw(c-597.08,-1639.5) U9.9@-597.08,-1592.43 ; U9.9@-597.08,-1592.43 ccw(c-597.08,-1545.35) -563.79,-1578.64 cw(c-597.08,-1545.35) U9.9@-597.08,-1592.43 ; U9.8@-574.09,-1586.26 cw(c-585.55,-1543.46) -612.36,-1578.75 ccw(c-585.55,-1543.46) U9.8@-574.09,-1586.26 ; U9.8@-574.09,-1586.26 ccw(c-562.34,-1630.09) -603.85,-1611.76 cw(c-562.34,-1630.09) U9.8@-574.09,-1586.26 ; U9.9@-623.7,-1605.95 cw(c-591.06,-1638.58) -591.06,-1592.43 ccw(c-591.06,-1638.58) U9.9@-623.7,-1605.95 ; U9.9@-609.55,-1620.09 cw(c-542.77,-1686.87) -542.77,-1592.43 ccw(c-542.77,-1686.87) U9.9@-609.55,-1620.09 ; U9.9@-593.12,-1605.92 ccw(c-603.18,-1568.37) -567.77,-1584.39 cw(c-603.18,-1568.37) U9.9@-593.12,-1605.92 ; -590.63,-1605.25 cw(c-580.1,-1644.55) -559.75,-1609.31 ccw(c-580.1,-1644.55) -590.63,-1605.25
  Top Layer w25: P3.2@196.88,140 212,155.12 C13.1@212,253 ; C13.1@197.25,234.01 cw(c142.58,202.45) 203.56,186.11 ; 204.09,185.38 ccw(c227.66,171.78) P3.2@208.73,152.23 ; 212,201.42 cw(c253.11,201.42) 224.04,230.49 ccw(c253.11,201.42) 212,201.42 ; 212,201.42 ccw(c170.89,201.42) 199.96,230.49 cw(c170.89,201.42) 212,201.42 ; P3.2@184.84,152.04 ccw(c119.28,217.61) 212,217.61 cw(c119.28,217.61) P3.2@184.84,152.04
  Bottom Layer w11: C8.2@202,-273.13 220.13,-255 ; C8.2@206.17,-262.04 ccw(c213.02,-250.28) 222.63,-259.92 ; C21.2@252.18,-153.32 253,-154.13 v1(253,-198) ; v1(325,-292) 325,-313.18 ; C20.2@349.82,-338 325,-313.18 ; 220.13,-255 cw(c220.13,-273.16) 233.83,-261.24 ccw(c220.13,-273.16) 220.13,-255 ; 220.13,-255 ccw(c220.13,-236.84) 233.83,-248.76 cw(c220.13,-236.84) 220.13,-255 ; 220.13,-255 cw(c205.38,-240.24) 202.96,-260.97 ccw(c205.38,-240.24) 220.13,-255 ; 220.13,-255 v1(241,-255) ; 222.6,-259.93 cw(c226.32,-273.78) v1@235.15,-262.48 ; 222.6,-259.93 ccw(c218.89,-246.08) v1@232.19,-251.44 ; 222.6,-259.93 cw(c226.32,-273.78) v1@235.15,-262.48 ; 222.6,-259.93 ccw(c218.89,-246.08) v1@232.19,-251.44 ; 222.6,-259.93 ccw(c218.89,-246.08) v1@232.19,-251.44 ; 222.6,-259.93 cw(c226.32,-273.78) v1@235.15,-262.48 ; v1(241,-255) ccw(c241,-291.79) 209.16,-273.35 cw(c241,-291.79) v1(241,-255) ; 253,-175.07 cw(c230.06,-175.07) 246.28,-191.28 ccw(c230.06,-175.07) 253,-175.07 ; 253,-175.07 ccw(c275.94,-175.07) 259.72,-191.28 cw(c275.94,-175.07) 253,-175.07 ; 325,-313.18 cw(c343.86,-313.18) 331.32,-299.09 ccw(c343.86,-313.18) 325,-313.18 ; 325,-313.18 ccw(c306.14,-313.18) 318.68,-299.09 cw(c306.14,-313.18) 325,-313.18 ; C8.2@199.65,-267.83 cw(c221.91,-280.73) 221.91,-255 ccw(c221.91,-280.73) C8.2@199.65,-267.83 ; C21.2@246.33,-159.17 cw(c230.22,-175.28) 253,-175.28 ccw(c230.22,-175.28) C21.2@246.33,-159.17 ; 253,-171.33 cw(c270.19,-171.33) 258.04,-159.17 ccw(c270.19,-171.33) 253,-171.33 ; 328.96,-317.15 cw(c308.11,-338) 337.6,-338 ccw(c308.11,-338) 328.96,-317.15
  other v1: -33,-1740 45,-1740 610,-1740 688,-1740 766,-1740 844,-1740 935,-1662 935,-1584 1123,-1559 880,-1520 -247,-1515 -142,-1515 -34,-1515 1123,-1481 -247,-1437 1123,-1403 -247,-1359 475,-1294 -247,-1281 -99,-1274 -21,-1274 57,-1274 475,-1216 553,-1216 631,-1216 709,-1216 787,-1216 865,-1216 943,-1216 475,-1138 553,-1138 709,-1138 943,-1138 1099,-1138 -631,-1075 -377,-1063 475,-1060 553,-1060 709,-1060 943,-1060 1099,-1060 -566,-1054 -631,-997 632,-983 475,-982 553,-982 709,-982 943,-982 1099,-982 -631,-919 53,-910 475,-904 553,-904 709,-904 787,-904 865,-904 943,-904 1021,-904 -631,-841 475,-826 182,-759 943,-735 1021,-735 1088,-670 960,-666 -302,-569 -630,-568 64,-501 -302,-491 470,-423 1044,-416 -302,-413 1044,-338 -302,-335 1044,-260 -302,-257 -630,-255 740,-187.82 1044,-182 -302,-179 -630,-177 1044,-104 -302,-101 -630,-99 63,-59 1044,-26 -302,-23 -630,-21 373,6 472,6 1044,52 -347,253 -269,253 -143,253 -65,253 13,253 646,253 724,253 802,253 880,253 -558,357 -558,435 -558,513 -558,591 -586,798 -508,798
KEY0: U6.29
KEY1: U6.33
KEY2: R14.2 S1.3 U6.17 | length 1375.6
  Top Layer w11: U6.17@258.2,-427.81 258.2,-479.2 300,-521 v1(300,-1163.99) ; S1.3@374.83,-1344.83 374.83,-1421.83 421.18,-1468.18 R14.2@482,-1468.18 ; 300,-1141.06 cw(c277.06,-1141.06) 293.28,-1157.27 ccw(c277.06,-1141.06) 300,-1141.06 ; 300,-1141.06 ccw(c322.94,-1141.06) 306.72,-1157.27 cw(c322.94,-1141.06) 300,-1141.06 ; 462.01,-1468.18 cw(c462.01,-1488.17) 476.15,-1474.04 ccw(c462.01,-1488.17) 462.01,-1468.18 ; 462.01,-1468.18 ccw(c462.01,-1448.19) 476.15,-1462.33 cw(c462.01,-1448.19) 462.01,-1468.18
  Bottom Layer w11: v1(300,-1163.99) 300,-1269.99 S1.3@374.83,-1344.83 ; 300,-1186.93 cw(c322.94,-1186.93) 306.72,-1170.71 ccw(c322.94,-1186.93) 300,-1186.93 ; 300,-1186.93 ccw(c277.06,-1186.93) 293.28,-1170.71 cw(c277.06,-1186.93) 300,-1186.93
NetC2_1: C2.1 C17.1 S6.1 U1.1 U1.3 | length 1712.5
  Top Layer w20: -520.74,-160.64 cw(c-539.44,-171.43) C2.1@-518.59,-177.02 ; U1.1@-429,-270 -429,-310 -446,-327 -486,-327 -503.8,-309.2 U1.3@-503.8,-270 -503.8,-185.2 C2.1@-511,-178 -524,-165 C17.1@-524,-49 -524,43 -453,114 -453,538 -359,632 -359,719.25 S6.1@-408.63,768.88 ; -524,-106.62 cw(c-476.86,-106.62) -510.19,-73.28 ccw(c-476.86,-106.62) -524,-106.62 ; -524,-106.62 ccw(c-571.14,-106.62) -537.81,-73.28 cw(c-571.14,-106.62) -524,-106.62 ; -524,8.62 cw(c-571.14,8.62) -537.81,-24.72 ccw(c-571.14,8.62) -524,8.62 ; -524,8.62 ccw(c-476.86,8.62) -510.19,-24.72 cw(c-476.86,8.62) -524,8.62 ; -524,-147 ccw(c-483.93,-147) -512.26,-175.33 cw(c-483.93,-147) -524,-147 ; C2.1@-509.74,-180.67 cw(c-524.06,-194.99) -503.8,-194.99 ccw(c-524.06,-194.99) C2.1@-509.74,-180.67
NetC3_1: C3.1 U1.4 | length 177.5
  Top Layer w11: C3.1@-601,-393 -584.3,-376.3 ; U1.4@-503.8,-376.3 -584.3,-376.3 ; -584.3,-376.3 cw(c-596.23,-364.37) -599.43,-380.93 ccw(c-596.23,-364.37) -584.3,-376.3 ; -516.66,-376.3 cw(c-516.66,-389.16) -507.57,-380.07 ccw(c-516.66,-389.16) -516.66,-376.3 ; -516.66,-376.3 ccw(c-516.66,-363.44) -507.57,-372.53 cw(c-516.66,-363.44) -516.66,-376.3
NetC11_1: C11.1 L1.1 U4.1 | length 202.8
  Top Layer w13: U4.1@1058,-1612.07 U4.1@1060,-1614.07
  Top Layer w28: U4.1@1058,-1612.07 C11.1@1058,-1459.32 ; 1058,-1582.08 ccw(c1088.06,-1582.08) 1066.8,-1603.33 cw(c1088.06,-1582.08) 1058,-1582.08
NetC15_2: C15.2 C16.1 U8.6 | length 542
  Top Layer w12: C16.1@-191,-1140 -132.5,-1140 C15.2@-123,-1130.5 -123,-1006 -84.43,-967.43 U8.6@-39,-967.43 ; -148.74,-1135.03 cw(c-142.83,-1145.27) C15.2@-132.78,-1139.05 ; -172.22,-1140 cw(c-172.22,-1121.22) -185.5,-1134.5 ccw(c-172.22,-1121.22) -172.22,-1140 ; -172.22,-1140 ccw(c-172.22,-1158.78) -185.5,-1145.5 cw(c-172.22,-1158.78) -172.22,-1140 ; -123,-1100.24 cw(c-150.76,-1100.24) -131.13,-1119.87 ccw(c-150.76,-1100.24) -123,-1100.24 ; -123,-1100.24 ccw(c-95.24,-1100.24) -114.87,-1119.87 cw(c-95.24,-1100.24) -123,-1100.24 ; -167.66,-1140 ccw(c-167.66,-1088.34) -131.13,-1124.87 cw(c-167.66,-1088.34) -167.66,-1140
NetD1_K: D1.K R10.1 S6.2 | length 2136.2
  Bottom Layer w30: -481,-943 -539,-885 ; v2(-436,-1049) -436,-988 -539,-885 ; S6.2@-408.63,847.62 -403.19,847.62 -339,783.44 -339,678.57 -465,552.57 -465,-390 -539,-464 -539,-885
  other v2: -436,-997
NetD2_K: D2.K R8.1 | length 82
  Bottom Layer w15: R8.1@777,-736.59 858.9,-736.59 D2.K@859,-736.49
NetD3_1: D3.1 R5.2 | length 211.7
  Top Layer w11: R5.2@565,-1468.5 571.82,-1475.32 D3.1@636,-1475.32 ; 607.03,-1475.32 cw(c607.03,-1504.29) 627.51,-1483.8 ccw(c607.03,-1504.29) 607.03,-1475.32 ; 607.03,-1475.32 ccw(c607.03,-1446.34) 627.51,-1466.83 cw(c607.03,-1446.34) 607.03,-1475.32 ; R5.2@570.85,-1466.58 ccw(c591.95,-1445.49) 591.95,-1475.32 cw(c591.95,-1445.49) R5.2@570.85,-1466.58